# Altium PCB CloudF4Block_MicroPython.PcbDoc
Units mil, origin at the board's own origin, x right, y up, seen from the top; angles counter-clockwise.
Board outline 2900 x 3400 mil, 2 copper layers (Top Layer, Bottom Layer); 35 components, 89 nets, 220 pads, 27 vias.
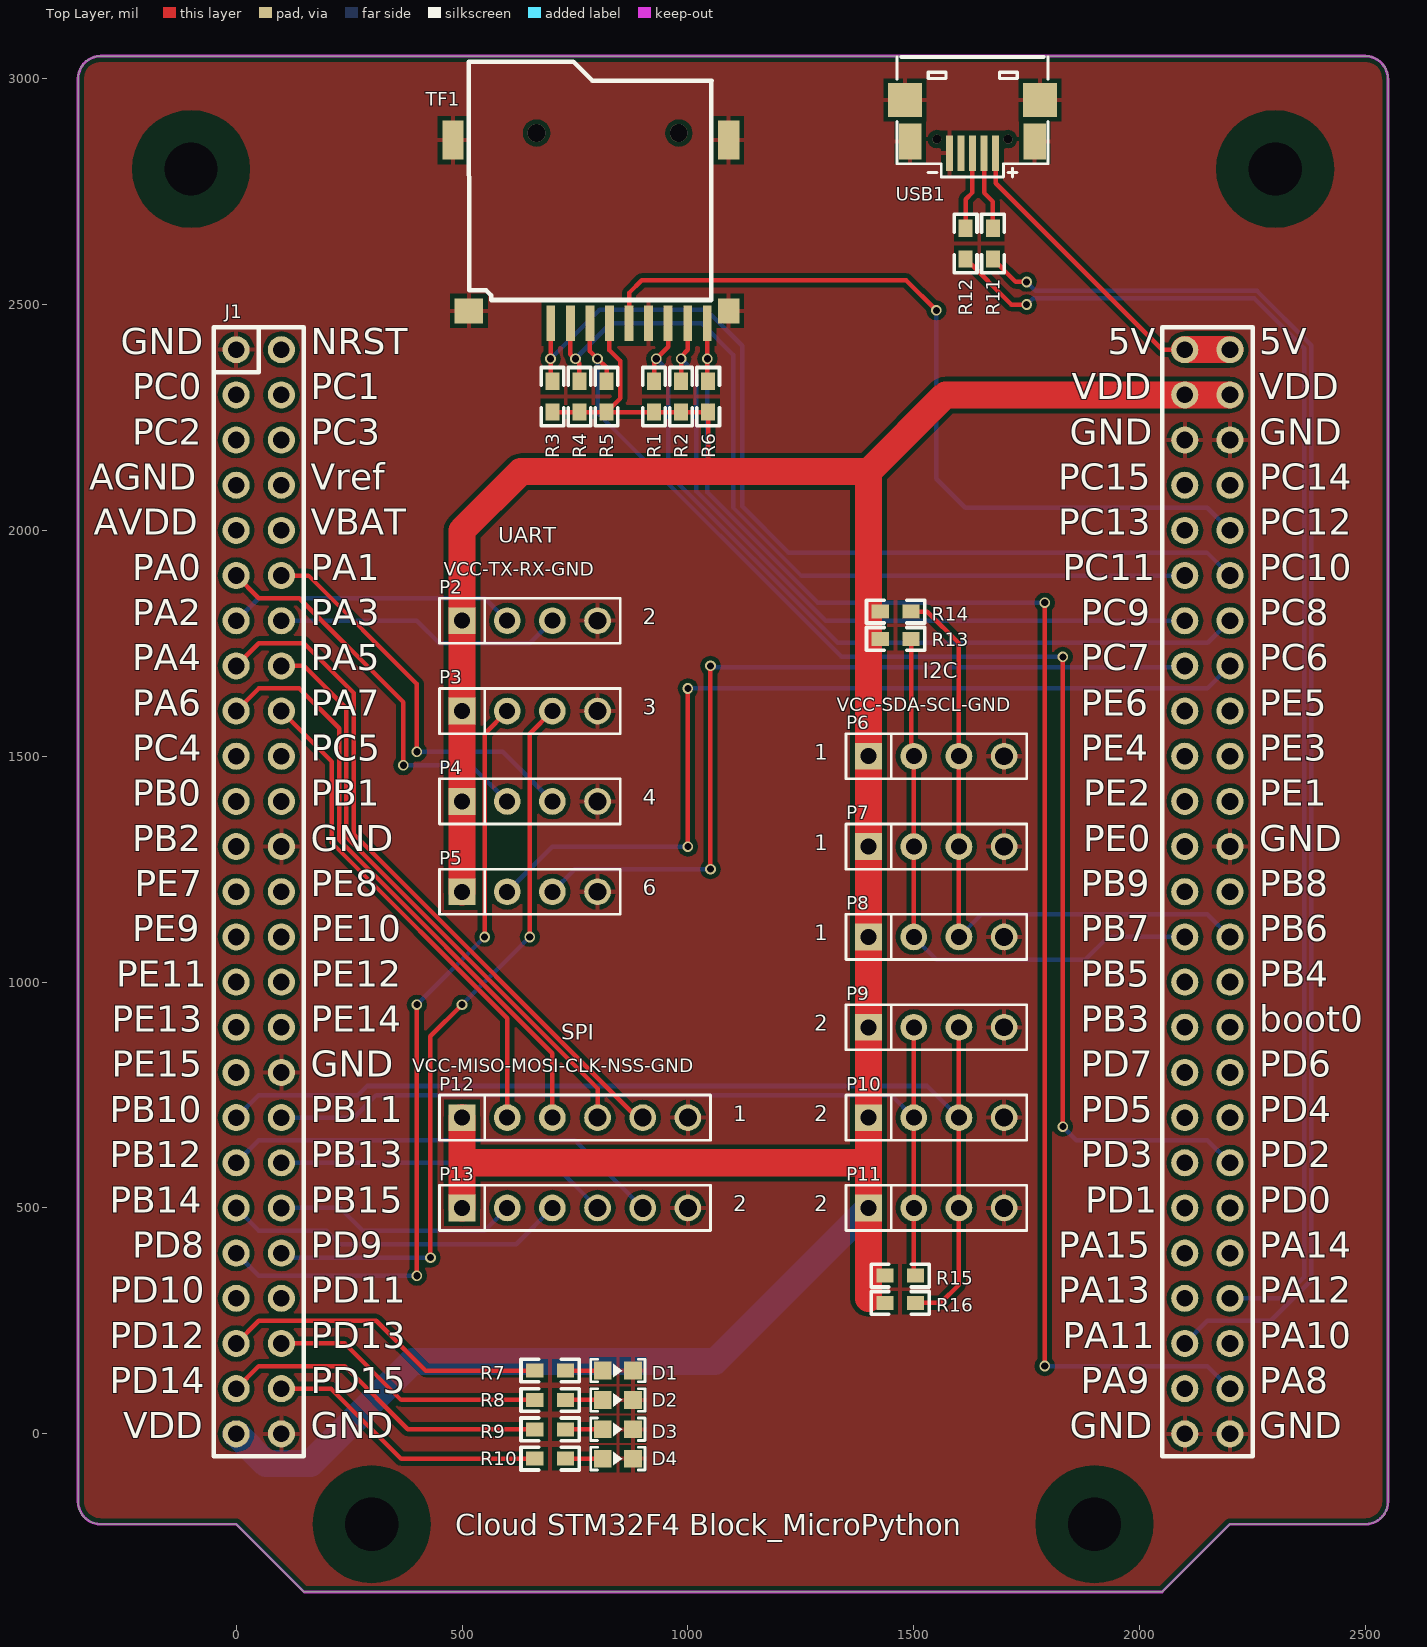
[diagram p0: Top Layer view]
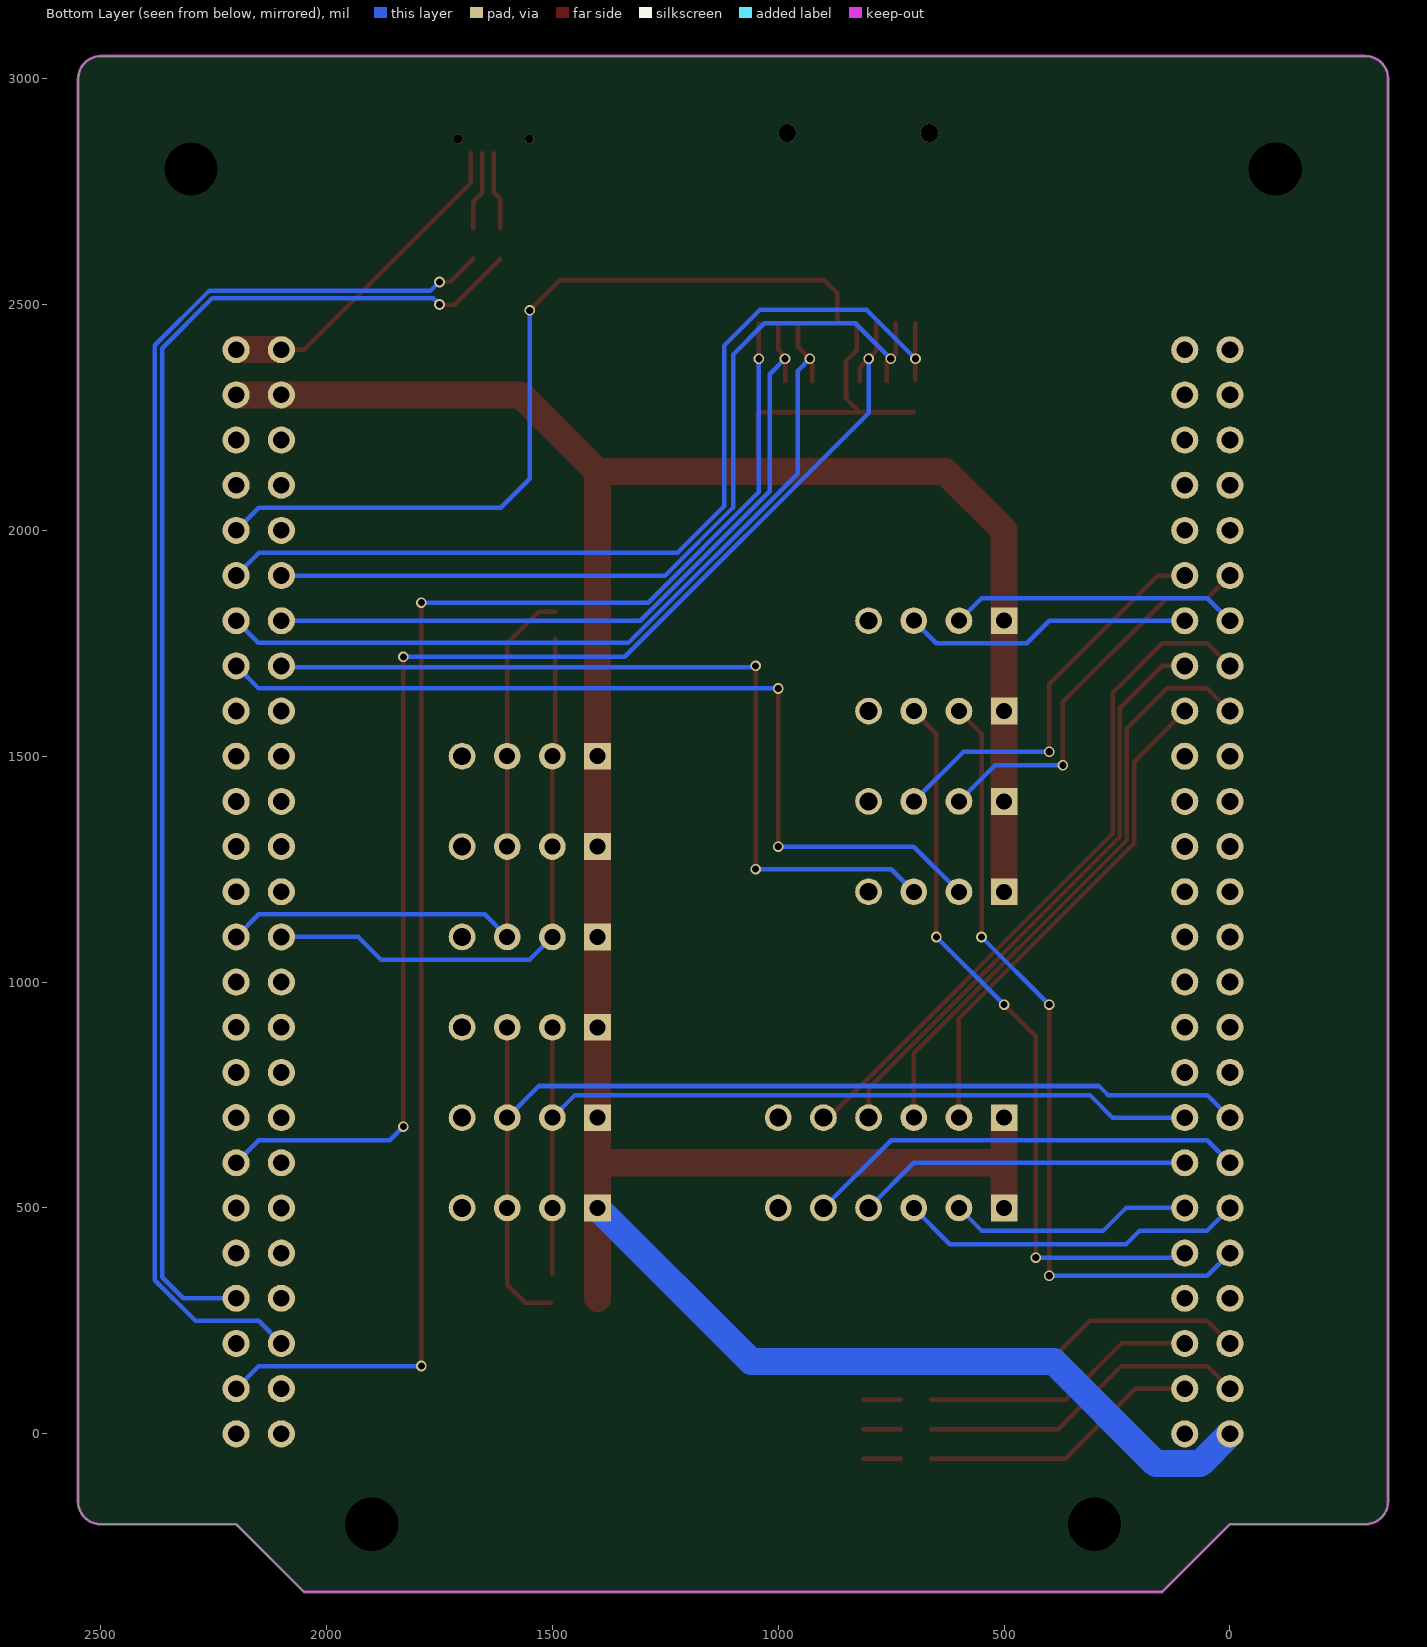
[diagram p1: Bottom Layer view, seen from below]

## Layer stack, top to bottom
Top Solder: solder mask 0.4, Solder Resist, Dk 3.5
Top Layer: signal copper 1.4
Dielectric 1: dielectric 12.6, FR-4, Dk 4.8
Bottom Layer: signal copper 1.4
Bottom Solder: solder mask 0.4, Solder Resist, Dk 3.5

## Board outline
-350,-150 ccw(c-300,-150) -300,-200 0,-200 150,-350 2050,-350 2200,-200 2500,-200 ccw(c2500,-150) 2550,-150 2550,3000 2549.57,3000 ccw(c2499.57,3000) 2499.57,3050 -300,3050 ccw(c-300,3000) -350,3000

## Design rules (kind name [scope] priority, off if disabled: settings)
Clearance Clearance_HolePad [HasPad('Free-0')] p1: gap=70.87
Clearance Clearance_of_Poly [InPolygon] p2: gap=10
Clearance [All] p3: gap=6
Height [All] p1 off: minheight=0 maxheight=1000 prefheight=500
HoleSize [All] p1: absolutevalues=TRUE maxlimit=3937.01 minlimit=11.81 maxpercent=80.000 minpercent=20.000
HoleToHoleClearance [All] p1 off: gap=10 allowstackedmicrovias=TRUE
LayerPairs [All] p1 off: enforce=TRUE
MinimumSolderMaskSliver [All] p1 off: minsoldermaskwidth=10
PolygonConnect PolygonConnect_novia [IsVia] p1: connectstyle=Direct reliefconductorwidth=10 reliefentries=4 polygonreliefangle="90 Angle" airgapwidth=10
PolygonConnect [All] p2: connectstyle=Relief reliefconductorwidth=10 reliefentries=4 polygonreliefangle="90 Angle" airgapwidth=10
RoutingVias [All] p1: holewidth=15.75 width=23.62 viastyle="Through Hole" minholewidth=11.81 minwidth=15.75 maxholewidth=3937.01 maxwidth=3937.01
SilkToBoardRegionClearance [All] p1 off:
SilkToSilkClearance [All] p1 off: silktosilkclearance=10
SilkToSolderMaskClearance [IsPad] p1 off: minsilkscreentomaskgap=10 clearancetoexposedcopper=TRUE
SolderMaskExpansion [All] p1: expansion=4
Width [All] p1: maxlimit=100 minlimit=6 preferedwidth=10
22 further rules are at their usual default settings.

## Components (designator, comment, footprint, x,y, rotation, side; value= is the part's Value field where it differs from the comment)
D1 "LED" 0603LED_RED 845,140 r0 top
D2 "LED" 0603LED_GREEN 845,75 r0 top
D3 "LED" 0603LED_ORANGE 845,10 r0 top
D4 "LED" 0603LED_YELLOW 845,-55 r0 top
J1 "CloudF4Block_Connector_MainPin" CloudF4BlockConnector 0,2400 r0 top locked
P2 "排针1X4" IDC1x4-2.54 500,1800 r0 top
P3 "排针1X4" IDC1x4-2.54 500,1600 r0 top
P4 "排针1X4" IDC1x4-2.54 500,1400 r0 top
P5 "排针1X4" IDC1x4-2.54 500,1200 r0 top
P6 "排针1X4" IDC1x4-2.54 1400,1500 r0 top
P7 "排针1X4" IDC1x4-2.54 1400,1300 r0 top
P8 "排针1X4" IDC1x4-2.54 1400,1100 r0 top
P9 "排针1X4" IDC1x4-2.54 1400,900 r0 top
P10 "排针1X4" IDC1x4-2.54 1400,700 r0 top
P11 "排针1X4" IDC1x4-2.54 1400,500 r0 top
P12 "排针1X6" IDC1x6-2.54 500,700 r0 top
P13 "排针1X6" IDC1x6-2.54 500,500 r0 top
R1 "RES" R-0603 925,2296 r90 top
R2 "RES" R-0603 985,2296 r90 top
R3 "RES" R-0603 700,2296 r90 top
R4 "RES" R-0603 760,2296 r90 top
R5 "RES" R-0603 820,2296 r90 top
R6 "RES" R-0603 1045,2296 r90 top
R7 "RES" R-0603 695,140 r180 top
R8 "RES" R-0603 695,75 r180 top
R9 "RES" R-0603 695,10 r180 top
R10 "RES" R-0603 695,-55 r180 top
R11 "RES" R-0603 1675,2635 r90 top
R12 "RES" R-0603 1615,2635 r90 top
R13 "RES" R-0603 1460,1760 r0 top
R14 "RES" R-0603 1460,1820 r0 top
R15 "RES" R-0603 1470,350 r0 top
R16 "RES" R-0603 1470,290 r0 top
TF1 "TF卡槽" TF_Card 785,2665 r0 top
USB1 "USB_micro" USB-MICRO 1630,2835 r180 top

## Footprints (in the part's own frame and the unit in brackets; to place one, negate y for a bottom-side part, rotate by r counter-clockwise, add the part's x,y. Pads: shape width x height; smd on the part's side, far side on the other; paste and mask are expansions set on the pad)
0603LED_GREEN [mm]
  rect 1x1 smd paste+0 mask+0: 1(-0.85,0) 2(0.85,0)
  silkscreen extent -1.52,-0.64 1.52,0.64, body extent -0.92,-0.53 1.09,0.53, height 0.46
0603LED_ORANGE [mm]
  rect 1x1 smd paste+0 mask+0: 1(-0.85,0) 2(0.85,0)
  silkscreen extent -1.52,-0.64 1.52,0.64, body extent -0.92,-0.53 1.09,0.53, height 0.46
0603LED_RED [mm]
  rect 1x1 smd paste+0 mask+0: 1(-0.85,0) 2(0.85,0)
  silkscreen extent -1.52,-0.64 1.52,0.64, body extent -0.92,-0.53 1.09,0.53, height 0.46
0603LED_YELLOW [mm]
  rect 1x1 smd paste+0 mask+0: 1(-0.85,0) 2(0.85,0)
  silkscreen extent -1.52,-0.64 1.52,0.64, body extent -0.92,-0.53 1.09,0.53, height 0.46
CloudF4BlockConnector [mil]
  round 60 hole 37: 1(0,0) 2(100,0) 3(0,-100) 4(100,-100) 5(0,-200) 6(100,-200) 7(0,-300) 8(100,-300) 9(0,-400) 10(100,-400) 11(0,-500) 12(100,-500) 13(0,-600) 14(100,-600) 15(0,-700) 16(100,-700) 17(0,-800) 18(100,-800) 19(0,-900) 20(100,-900) 21(0,-1000) 22(100,-1000) 23(0,-1100) 24(100,-1100) 25(0,-1200) 26(100,-1200) 27(0,-1300) 28(100,-1300) 29(0,-1400) 30(100,-1400) 31(0,-1500) 32(100,-1500) 33(0,-1600) 34(100,-1600) 35(0,-1700) 36(100,-1700) 37(0,-1800) 38(100,-1800) 39(0,-1900) 40(100,-1900) 41(0,-2000) 42(100,-2000) 43(0,-2100) 44(100,-2100) 45(0,-2200) 46(100,-2200) 47(0,-2300) 48(100,-2300) 49(0,-2400) 50(100,-2400) 51(2100,0) 52(2200,0) 53(2100,-100) 54(2200,-100) 55(2100,-200) 56(2200,-200) 57(2100,-300) 58(2200,-300) 59(2100,-400) 60(2200,-400) 61(2100,-500) 62(2200,-500) 63(2100,-600) 64(2200,-600) 65(2100,-700) 66(2200,-700) 67(2100,-800) 68(2200,-800) 69(2100,-900) 70(2200,-900) 71(2100,-1000) 72(2200,-1000) 73(2100,-1100) 74(2200,-1100) 75(2100,-1200) 76(2200,-1200) 77(2100,-1300) 78(2200,-1300) 79(2100,-1400) 80(2200,-1400) 81(2100,-1500) 82(2200,-1500) 83(2100,-1600) 84(2200,-1600) 85(2100,-1700) 86(2200,-1700) 87(2100,-1800) 88(2200,-1800) 89(2100,-1900) 90(2200,-1900) 91(2100,-2000) 92(2200,-2000) 93(2100,-2100) 94(2200,-2100) 95(2100,-2200) 96(2200,-2200) 97(2100,-2300) 98(2200,-2300) 99(2100,-2400) 100(2200,-2400)
  silkscreen extent -50,-2450 2250,50, body extent -50,-2460 2250,50, height 329
IDC1x4-2.54 [mm]
  rect 1.5x1.5 hole 0.9: 1(0,0)
  round 1.5 hole 0.9: 2(2.54,0) 3(5.08,0)
  round 1.5 hole 1: 4(7.62,0)
  silkscreen extent -1.27,-1.27 8.89,1.27, body extent -1.27,-1.27 8.85,1.23, height 8.24
IDC1x6-2.54 [mm]
  rect 1.5x1.5 hole 0.9: 1(0,0)
  round 1.5 hole 0.9: 2(2.54,0) 3(5.08,0)
  round 1.5 hole 1: 4(7.62,0) 5(10.16,0) 6(12.7,0)
  silkscreen extent -1.27,-1.27 13.97,1.27, body extent -1.27,-1.25 13.93,1.25, height 8.24
R-0603 [mil] "1/10W"
  rect 38x31 smd: 1(-34,0) 2(34,0)
  silkscreen extent -64,-25 64,25, body extent -31,-16 32,16, height 18
TF_Card [mm]
  rect 0.5x2 smd: 1(-2.25,-5.25) 2(-1.15,-5.25) 3(-0.05,-5.25) 4(1.05,-5.25) 5(2.15,-5.25) 6(3.25,-5.25) 7(4.35,-5.25) 8(5.45,-5.25) 9(6.55,-5.25)
  rect 1.2x2.2 smd: 10(-7.75,5.05) 10(7.75,5.05)
  rect 1.6x1.4 smd: 10(-6.85,-4.55)
  rect 1.2x1.4 smd: 10(7.75,-4.55)
  silkscreen extent -6.86,-3.94 6.8,9.47, body extent -8,-5.85 8,9.4, height 1.85
USB-MICRO [mm]
  rect 1.9x1.9 smd: 0(-3.797,-2.992) 0(3.797,-2.992)
  rect 1.25x2 smd: 0(-3.5,-0.659) 0(3.5,-0.659)
  rect 0.4x2 smd: 1(-1.3,-0.008) 2(-0.65,-0.008) 3(0,-0.008) 4(0.65,-0.008) 5(1.3,-0.008)
  round 0.5 hole 0.5 unplated: ""(-2,-0.792) ""(2,-0.792)
  silkscreen extent -4.25,-5.41 4.25,1.34, body extent -4.1,-5.57 4.1,0.36, height 2.77

## Free pads (board coordinates)
  round 0 hole 118.11: 0(-100,2800) 0(300,-200) 0(1900,-200) 0(2300,2800)

## Via types
v1: diameter 23.62, hole 15.75, Top Layer to Bottom Layer, 25 vias
v2: diameter 39.37, hole 39.37, Top Layer to Bottom Layer, 2 vias

## Nets (pads, with @x,y where several pads share a name; then routed paths per layer and width w, separated by ;. In a path a pad name is that pad's centre, name@x,y a point inside that pad or via, vN(x,y) a via of type N, cw(c..) or ccw(c..) an arc to the next point about the centre after c; other vN are vias at no path point)
5V: J1.51 J1.52 USB1.1 | length 738.1
  Top Layer w10: USB1.1 1681.18,2768.82 2050,2400 J1.51
  Top Layer w60: J1.51 J1.52
GND: D1.2 D2.2 D3.2 D4.2 J1.1 J1.24 J1.34 J1.50 J1.55 J1.56 J1.74 J1.99 J1.100 P2.4 P3.4 P4.4 P5.4 P6.4 P7.4 P8.4 P9.4 P10.4 P11.4 P12.6 P13.6 TF1.6 TF1.10 USB1.0 USB1.5
I2C1_SCL: J1.78 P6.3 P7.3 P8.3 R14.2 | length 1426.4
  Top Layer w10: R14.2 1530,1820 1600,1750 P6.3 P7.3 P8.3
  Bottom Layer w10: P8.3 1650,1150 2150,1150 J1.78
I2C1_SDA: J1.77 P6.2 P7.2 P8.2 R13.2 | length 1303.9
  Top Layer w10: R13.2 1494,1506 P6.2 P7.2 P8.2
  Bottom Layer w10: P8.2 1550,1050 1880,1050 1930,1100 J1.77
I2C2_SCL: J1.35 P9.3 P10.3 P11.3 R16.2 | length 2340.6
  Top Layer w10: R16.2 1560,290 1600,330 P11.3 P10.3 P9.3
  Bottom Layer w10: J1.35 50,750 270,750 290,770 1530,770 P10.3
I2C2_SDA: J1.36 P9.2 P10.2 P11.2 R15.2 | length 1987.4
  Top Layer w10: R15.2@1500,354 P11.2 P10.2 P9.2
  Bottom Layer w10: J1.36 260,700 310,750 1450,750 P10.2
LED1: J1.45 R7.2 | length 727.3
  Top Layer w10: J1.45 50,250 310,250 420,140 R7.2
LED2: J1.46 R8.2 | length 612.8
  Top Layer w10: J1.46 240,200 365,75 R8.2
LED3: J1.47 R9.2 | length 739.7
  Top Layer w10: J1.47 50,150 240,150 380,10 R9.2
LED4: J1.48 R10.2 | length 625.2
  Top Layer w10: J1.48 210,100 365,-55 R10.2
NetD1_1: D1.1 R7.1 | length 82.5
  Top Layer w10: R7.1 D1.1
NetD2_1: D2.1 R8.1 | length 82.5
  Top Layer w10: R8.1 D2.1
NetD3_1: D3.1 R9.1 | length 82.5
  Top Layer w10: R9.1 D3.1
NetD4_1: D4.1 R10.1 | length 82.5
  Top Layer w10: R10.1 D4.1
PA0: J1.11 P4.2 | length 889.1
  Top Layer w10: J1.11 50,1850 140,1850 370,1620 v1(370,1480)
  Bottom Layer w10: v1(370,1480) 520,1480 P4.2
PA1: J1.12 P4.3 | length 895
  Top Layer w10: J1.12 160,1900 400,1660 v1(400,1510)
  Bottom Layer w10: v1(400,1510) 590,1510 P4.3
PA2: J1.13 P2.2 | length 641.4
  Bottom Layer w10: J1.13 50,1850 550,1850 P2.2
PA3: J1.14 P2.3 | length 641.4
  Bottom Layer w10: J1.14 400,1800 450,1750 650,1750 P2.3
PA4: J1.15 P12.5 | length 1538.5
  Top Layer w10: J1.15 50,1750 150,1750 260,1640 260,1327.88 887.88,700 P12.5
PA5: J1.16 P12.4 | length 1319.2
  Top Layer w10: J1.16 150,1700 244,1606 244,1321.25 800,765.25 P12.4
PA6: J1.17 P12.3 | length 1342.7
  Top Layer w10: J1.17 50,1650 140,1650 228,1562 228,1314.63 700,842.63 P12.3
PA7: J1.18 P12.2 | length 1107.1
  Top Layer w10: J1.18 212,1488 212,1308 600,920 P12.2
PA8: J1.98 R6.2 TF1.9 | length 3390.4
  Top Layer w10: R6.2@1042.87,2332.13 TF1.9 ; v1(1790,150) v1(1790,1840)
  Bottom Layer w10: v1(1043,2380) 1043,2084.88 1287.88,1840 v1(1790,1840) ; v1(1790,150) 2150,150 J1.98
PA9: J1.97
PA10: J1.96
PA11: J1.95 R11.1 | length 3192.1
  Top Layer w10: R11.1 1726,2550 v1(1750,2550)
  Bottom Layer w10: v1(1750,2550) 1770,2530 2260,2530 2380,2410 2380,340 2290,250 2150,250 J1.95
PA12: J1.94 R12.1 | length 3082.5
  Top Layer w10: R12.1 1716,2500 v1(1750,2500)
  Bottom Layer w10: v1(1750,2500) 1764,2514 2253.37,2514 2364,2403.37 2364,346.63 2317.37,300 J1.94
PA13: J1.93
PA14: J1.92
PA15: J1.91
PB0: J1.21
PB1: J1.22
PB2: J1.23
PB3: J1.81
PB4: J1.80
PB5: J1.79
PB8: J1.76
PB9: J1.75
PB12: J1.37 P13.5 | length 982.8
  Bottom Layer w10: J1.37 50,650 750,650 P13.5
PB13: J1.38 P13.4 | length 741.4
  Bottom Layer w10: J1.38 700,600 P13.4
PB14: J1.39 P13.3 | length 766.3
  Bottom Layer w10: J1.39 50,450 200,450 230,420 620,420 P13.3
PB15: J1.40 P13.2 | length 541.4
  Bottom Layer w10: J1.40 230,500 280,450 550,450 P13.2
PC0: J1.3
PC1: J1.4
PC2: J1.5
PC3: J1.6
PC4: J1.19
PC5: J1.20
PC6: J1.66 P5.2 | length 2012.1
  Top Layer w10: v1(1000,1300) v1(1000,1650)
  Bottom Layer w10: P5.2 700,1300 v1(1000,1300) ; v1(1000,1650) 2150,1650 J1.66
PC7: J1.65 P5.3 | length 1873
  Top Layer w10: v1(1050,1250) v1(1050,1700)
  Bottom Layer w10: P5.3 750,1250 v1(1050,1250) ; v1(1050,1700) 1052.81,1697.19 2097.19,1697.19 J1.65
PC8: J1.64 R1.2 TF1.7 | length 1825.3
  Top Layer w10: R1.2 925,2375 v1(930,2380) 956.26,2406.26 TF1.7
  Bottom Layer w10: v1(930,2380) 957,2353 957,2125.63 1331.63,1751 2151,1751 J1.64
PC9: J1.63 R2.2 TF1.8 | length 1641.7
  Top Layer w10: R2.2 v1(985,2380) 985,2385 999.57,2399.57 TF1.8
  Bottom Layer w10: v1(985,2380) 1019,2346 1019,2086.25 1305.25,1800 J1.63
PC10: J1.62 R3.2 TF1.1 | length 2125.5
  Top Layer w10: R3.2@696.42,2333.58 TF1.1
  Bottom Layer w10: v1(696,2380) 804,2488 1041,2488 1120,2409 1120,2053.14 1222.14,1951 2149,1951 J1.62
PC11: J1.61 R4.2 TF1.2 | length 1947.7
  Top Layer w10: TF1.2 739.72,2390.28 760,2370 R4.2
  Bottom Layer w10: v1(751,2380) 829.31,2458.31 1030.69,2458.31 1100,2389 1100,2050.51 1250.51,1900 J1.61
PC12: J1.60 TF1.5 | length 1857.4
  Top Layer w10: TF1.5 869.65,2525.65 898,2554 1483,2554 v1(1550,2487)
  Bottom Layer w10: v1(1550,2487) 1550,2114 1614,2050 2150,2050 J1.60
PC13: J1.59
PC14: J1.58
PC15: J1.57
PD0: J1.90
PD1: J1.89
PD2: J1.88 R5.2 TF1.3 | length 2960.4
  Top Layer w10: TF1.3 783.03,2396.97 v1(800,2380) 820,2360 R5.2 ; v1(1830,680) v1(1830,1720)
  Bottom Layer w10: v1(800,2380) 800,2260 1340,1720 v1(1830,1720) ; v1(1830,680) 1860,650 2150,650 J1.88
PD3: J1.87
PD4: J1.86
PD5: J1.85
PD6: J1.84
PD7: J1.83
PD8: J1.41 P3.2 | length 1753.6
  Top Layer w10: v1(400,350) v1(400,950) ; v1(550,1100) 550,1550 P3.2
  Bottom Layer w10: J1.41 50,350 v1(400,350) ; v1(400,950) v1(550,1100)
PD9: J1.42 P3.3 | length 1641.8
  Top Layer w10: v1(430,390) 430,880 v1(500,950) ; v1(650,1100) 650,1550 P3.3
  Bottom Layer w10: J1.42@110,390 v1(430,390) ; v1(500,950) v1(650,1100)
PD10: J1.43
PD11: J1.44
PE0: J1.73
PE1: J1.72
PE2: J1.71
PE3: J1.70
PE4: J1.69
PE5: J1.68
PE6: J1.67
PE7: J1.25
PE8: J1.26
PE9: J1.27
PE10: J1.28
PE11: J1.29
PE12: J1.30
PE13: J1.31
PE14: J1.32
PE15: J1.33
USB-D+: R12.2 USB1.3 | length 172.5
  Top Layer w10: R12.2 1615,2733 1630,2748 USB1.3
USB-D-: R11.2 USB1.2 | length 174.3
  Top Layer w10: USB1.2 1655.59,2747.41 1675,2728 R11.2
VCC: J1.49 J1.53 J1.54 P2.1 P3.1 P4.1 P5.1 P6.1 P7.1 P8.1 P9.1 P10.1 P11.1 P12.1 P13.1 R1.1 R2.1 R3.1 R4.1 R5.1 R6.1 R13.1 R14.1 R15.1 R16.1 TF1.4 | length 7886.6
  Top Layer w10: R3.1 R4.1 R5.1 ; TF1.4 826.34,2398.66 850,2375 850,2292 R5.1 ; 1045,2155 R6.1 R2.1 R1.1 R5.1
  Top Layer w60: P13.1 P12.1 ; 500,600 1400,600 ; P5.1 P4.1 P3.1 P2.1 500,2000 630,2130 1400,2130 ; 1400,300 P11.1 1400,600 ; J1.54 J1.53 1570,2300 1400,2130 ; 1400,600 P10.1 P9.1 P8.1 P7.1 P6.1 1400,2130
  Bottom Layer w60: J1.49 66,-66 164,-66 390,160 1060,160 P11.1
pads on no net: J1.2 J1.7 J1.8 J1.9 J1.10 J1.82 USB1. USB1.4
copper on no net:
  other v2: 664.92,2879.57 979.88,2879.57

## Polygon pours and split planes (outlines as drawn)
GND on Top Layer "Top Layer-No Net" (solid, remove dead copper, pour order 2): -350,3060 -350,-350 2550,-350 2550,3050

## Keep-outs
Keep-Out Layer:
  lines w6: 2549.57,3000 ccw(c2499.57,3000) 2499.57,3050 -300,3050 ccw(c-300,3000) -350,3000 -350,-150 ccw(c-300,-150) -300,-200 0,-200 150,-350 2050,-350 2200,-200 2500,-200 ccw(c2500,-150) 2550,-150 2550,3000

## Silkscreen, mask and mechanical layers (free items; w line width, h text height)
Top Overlay:
  text "UART" at 580,1960 h60
  text "VCC-TX-RX-GND" at 460,1900 h30
  text "2" at 900,1780 h60
  text "I2C" at 1520,1660 h60
  text "VCC-SDA-SCL-GND" at 1330,1600 h30
  text "3" at 900,1580 h60
  text "1" at 1280,1480 h60
  text "4" at 900,1380 h60
  text "1" at 1280,1280 h60
  text "6" at 900,1180 h60
  text "1" at 1280,1080 h60
  text "2" at 1280,880 h60
  text "SPI" at 720,860 h60
  text "VCC-MISO-MOSI-CLK-NSS-GND" at 390,800 h30
  text "1" at 1100,680 h60
  text "2" at 1280,680 h60
  text "2" at 1100,480 h60
  text "2" at 1280,480 h60
  text "Cloud STM32F4 Block_MicroPython" at 485,-240 h80

## Text inside footprints (layer, text, board x,y; h text height)
J1: Top Overlay "NRST" at 165,2370 h100; Top Overlay "GND" at -255,2370 h100; Top Overlay "PC0" at -230,2270 h100; Top Overlay "PC1" at 165,2270 h100; Top Overlay "Vref" at 165,2070 h100; Top Overlay "AGND" at -325,2070 h100; Top Overlay "PC2" at -230,2170 h100; Top Overlay "PC3" at 165,2170 h100; Top Overlay "PA3" at 165,1770 h100; Top Overlay "PA2" at -230,1770 h100; Top Overlay "PA4" at -230,1670 h100; Top Overlay "PA5" at 165,1670 h100; Top Overlay "PA1" at 165,1870 h100; Top Overlay "PA0" at -230,1870 h100; Top Overlay "AVDD" at -315,1970 h100; Top Overlay "VBAT" at 165,1970 h100; Top Overlay "PE8" at 165,1170 h100; Top Overlay "PE7" at -225,1170 h100; Top Overlay "PE9" at -230,1070 h100; Top Overlay "PE10" at 165,1070 h100; Top Overlay "PE14" at 165,870 h100; Top Overlay "PE13" at -275,870 h100; Top Overlay "PE11" at -265,970 h100; Top Overlay "PE12" at 165,970 h100; Top Overlay "PB1" at 165,1370 h100; Top Overlay "PB0" at -230,1370 h100; Top Overlay "PB2" at -230,1270 h100; Top Overlay "GND" at 165,1270 h100; Top Overlay "PC5" at 165,1470 h100; Top Overlay "PC4" at -230,1470 h100; Top Overlay "PA6" at -230,1570 h100; Top Overlay "PA7" at 165,1570 h100; Top Overlay "PD9" at 165,370 h100; Top Overlay "PD8" at -230,370 h100; Top Overlay "PD10" at -280,270 h100; Top Overlay "PD11" at 165,270 h100; Top Overlay "PD15" at 165,70 h100; Top Overlay "PD14" at -280,70 h100; Top Overlay "PD12" at -280,170 h100; Top Overlay "PD13" at 165,170 h100; Top Overlay "PB13" at 165,570 h100; Top Overlay "PB12" at -280,570 h100; Top Overlay "PB14" at -280,470 h100; Top Overlay "PB15" at 165,470 h100; Top Overlay "PB11" at 165,670 h100; Top Overlay "PB10" at -280,670 h100; Top Overlay "PE15" at -275,770 h100; Top Overlay "GND" at 165,770 h100; Top Overlay "VDD" at -250,-30 h100; Top Overlay "GND" at 165,-30 h100; Top Overlay "GND" at 1845,-30 h100; Top Overlay "PD7" at 1870,770 h100; Top Overlay "PD5" at 1870,670 h100; Top Overlay "PD1" at 1880,470 h100; Top Overlay "PD3" at 1870,570 h100; Top Overlay "PA11" at 1830,170 h100; Top Overlay "PA9" at 1870,70 h100; Top Overlay "PA13" at 1820,270 h100; Top Overlay "PA15" at 1820,370 h100; Top Overlay "PE6" at 1870,1570 h100; Top Overlay "PE4" at 1870,1470 h100; Top Overlay "PE0" at 1875,1270 h100; Top Overlay "PE2" at 1875,1370 h100; Top Overlay "PB5" at 1870,970 h100; Top Overlay "PB3" at 1870,870 h100; Top Overlay "PB7" at 1870,1070 h100; Top Overlay "PB9" at 1870,1170 h100; Top Overlay "PC13" at 1820,1970 h100; Top Overlay "PC11" at 1830,1870 h100; Top Overlay "PC7" at 1870,1670 h100; Top Overlay "PC9" at 1870,1770 h100; Top Overlay "GND" at 1845,2170 h100; Top Overlay "PC15" at 1820,2070 h100; Top Overlay "VDD" at 1850,2270 h100; Top Overlay "5V" at 1930,2370 h100; Top Overlay "GND" at 2265,-30 h100; Top Overlay "PD6" at 2265,770 h100; Top Overlay "PD4" at 2265,670 h100; Top Overlay "PD0" at 2265,470 h100; Top Overlay "PD2" at 2265,570 h100; Top Overlay "PA10" at 2265,170 h100; Top Overlay "PA8" at 2265,70 h100; Top Overlay "PA12" at 2265,270 h100; Top Overlay "PA14" at 2265,370 h100; Top Overlay "PE5" at 2265,1570 h100; Top Overlay "PE3" at 2265,1470 h100; Top Overlay "GND" at 2265,1270 h100; Top Overlay "PE1" at 2265,1370 h100; Top Overlay "PB4" at 2265,970 h100; Top Overlay "boot0" at 2265,870 h100; Top Overlay "PB6" at 2265,1070 h100; Top Overlay "PB8" at 2265,1170 h100; Top Overlay "PC12" at 2265,1970 h100; Top Overlay "PC10" at 2265,1870 h100; Top Overlay "PC6" at 2265,1670 h100; Top Overlay "PC8" at 2265,1770 h100; Top Overlay "GND" at 2265,2170 h100; Top Overlay "PC14" at 2265,2070 h100; Top Overlay "VDD" at 2265,2270 h100; Top Overlay "5V" at 2265,2370 h100